# Altium PCB AT_32_PCB.PcbDoc
Units mm, origin at the board's own origin, x right, y up, seen from the top; angles counter-clockwise.
Board outline 107 x 107 mm, 2 copper layers (Top Layer, Bottom Layer); 69 components, 56 nets, 273 pads, 0 vias.
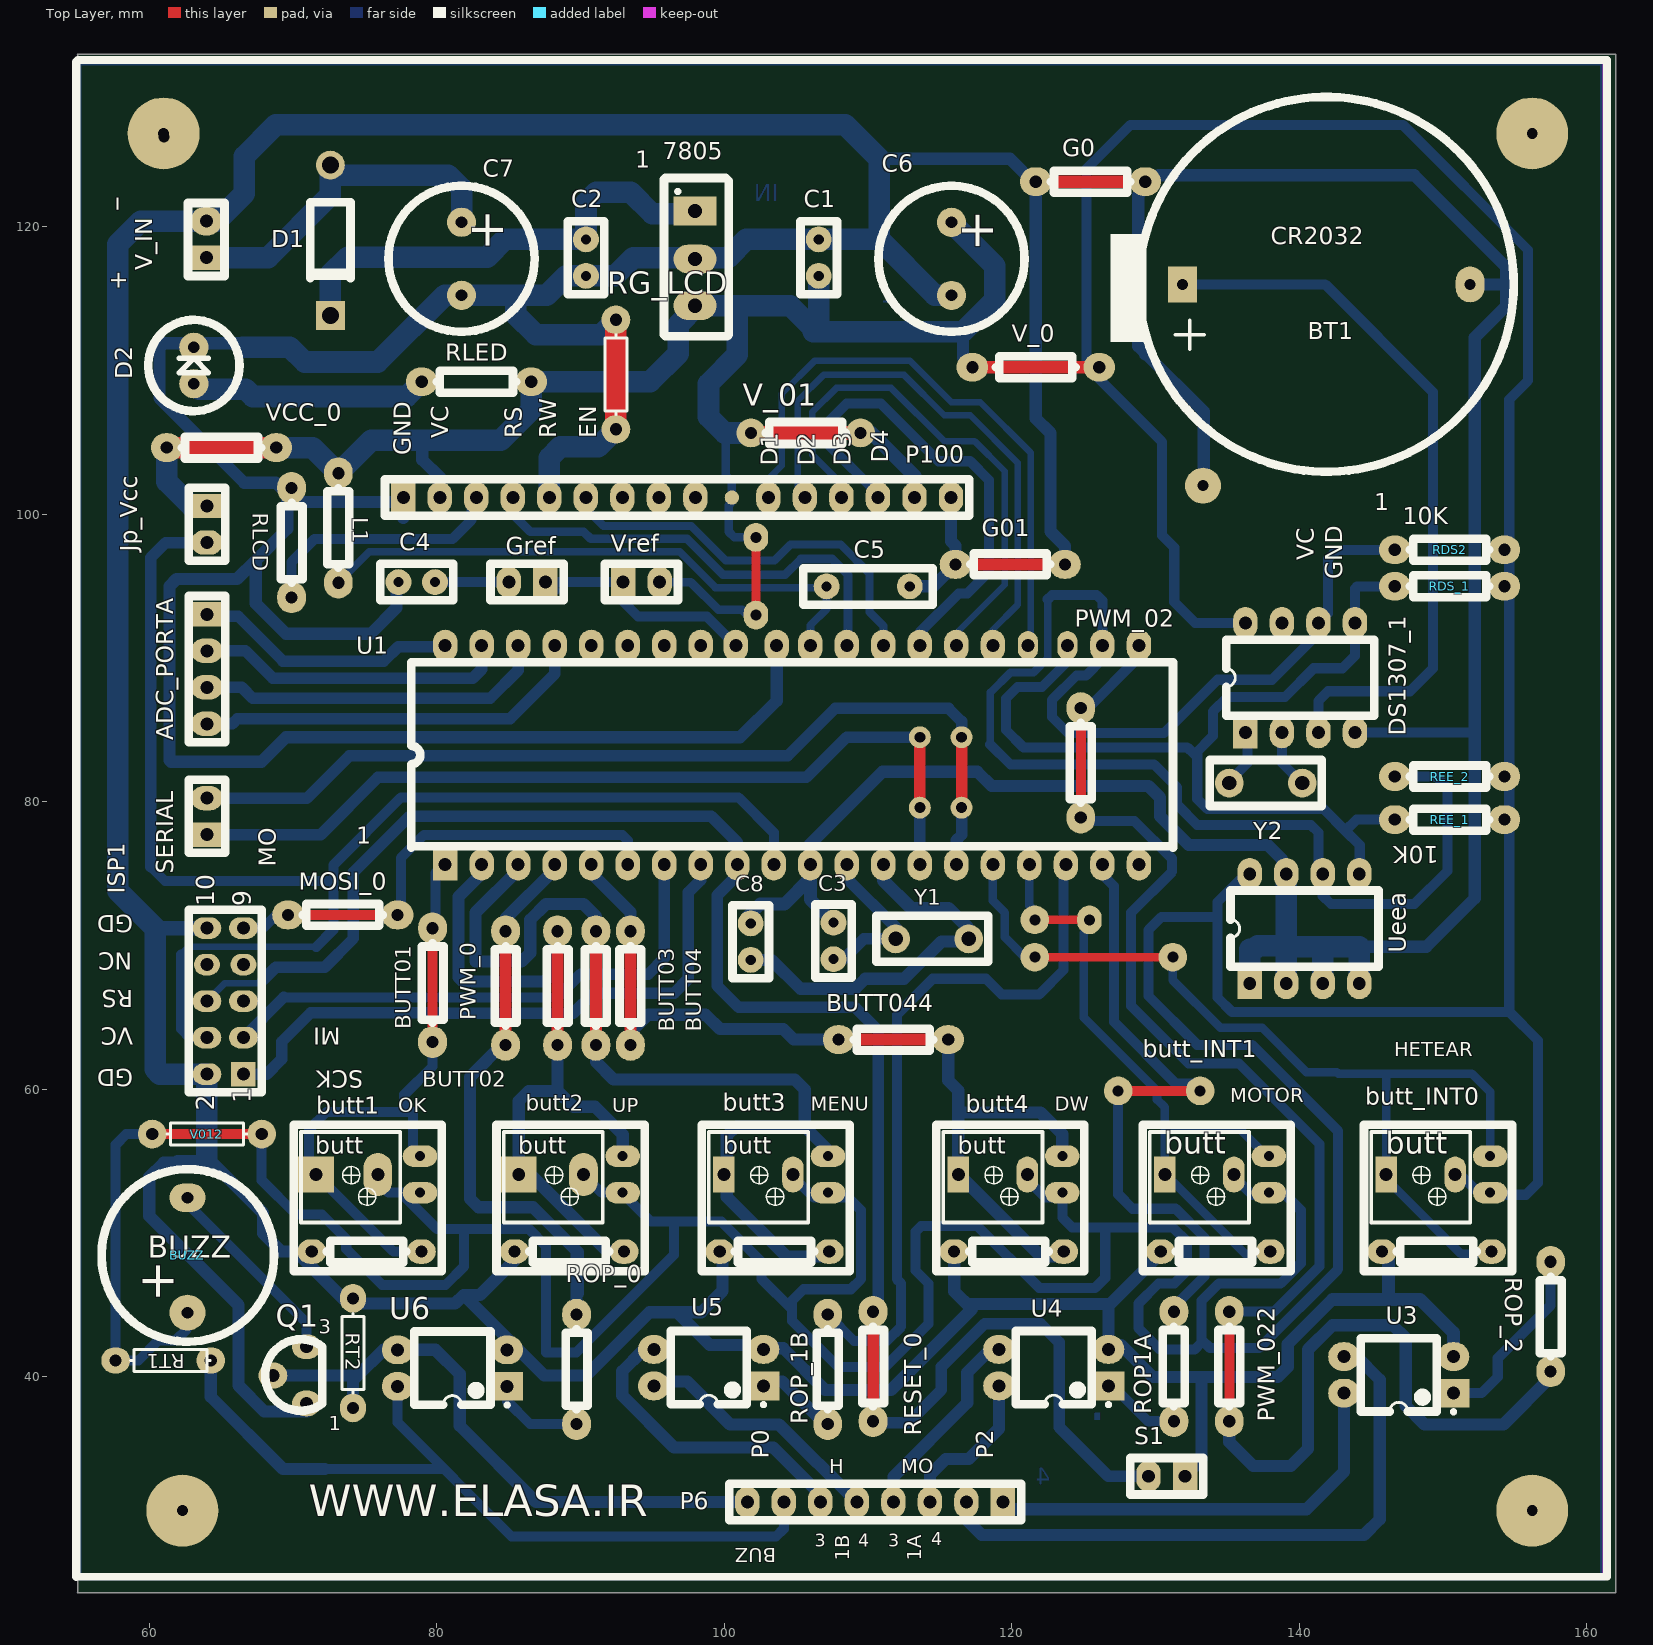
[diagram p0: Top Layer view]
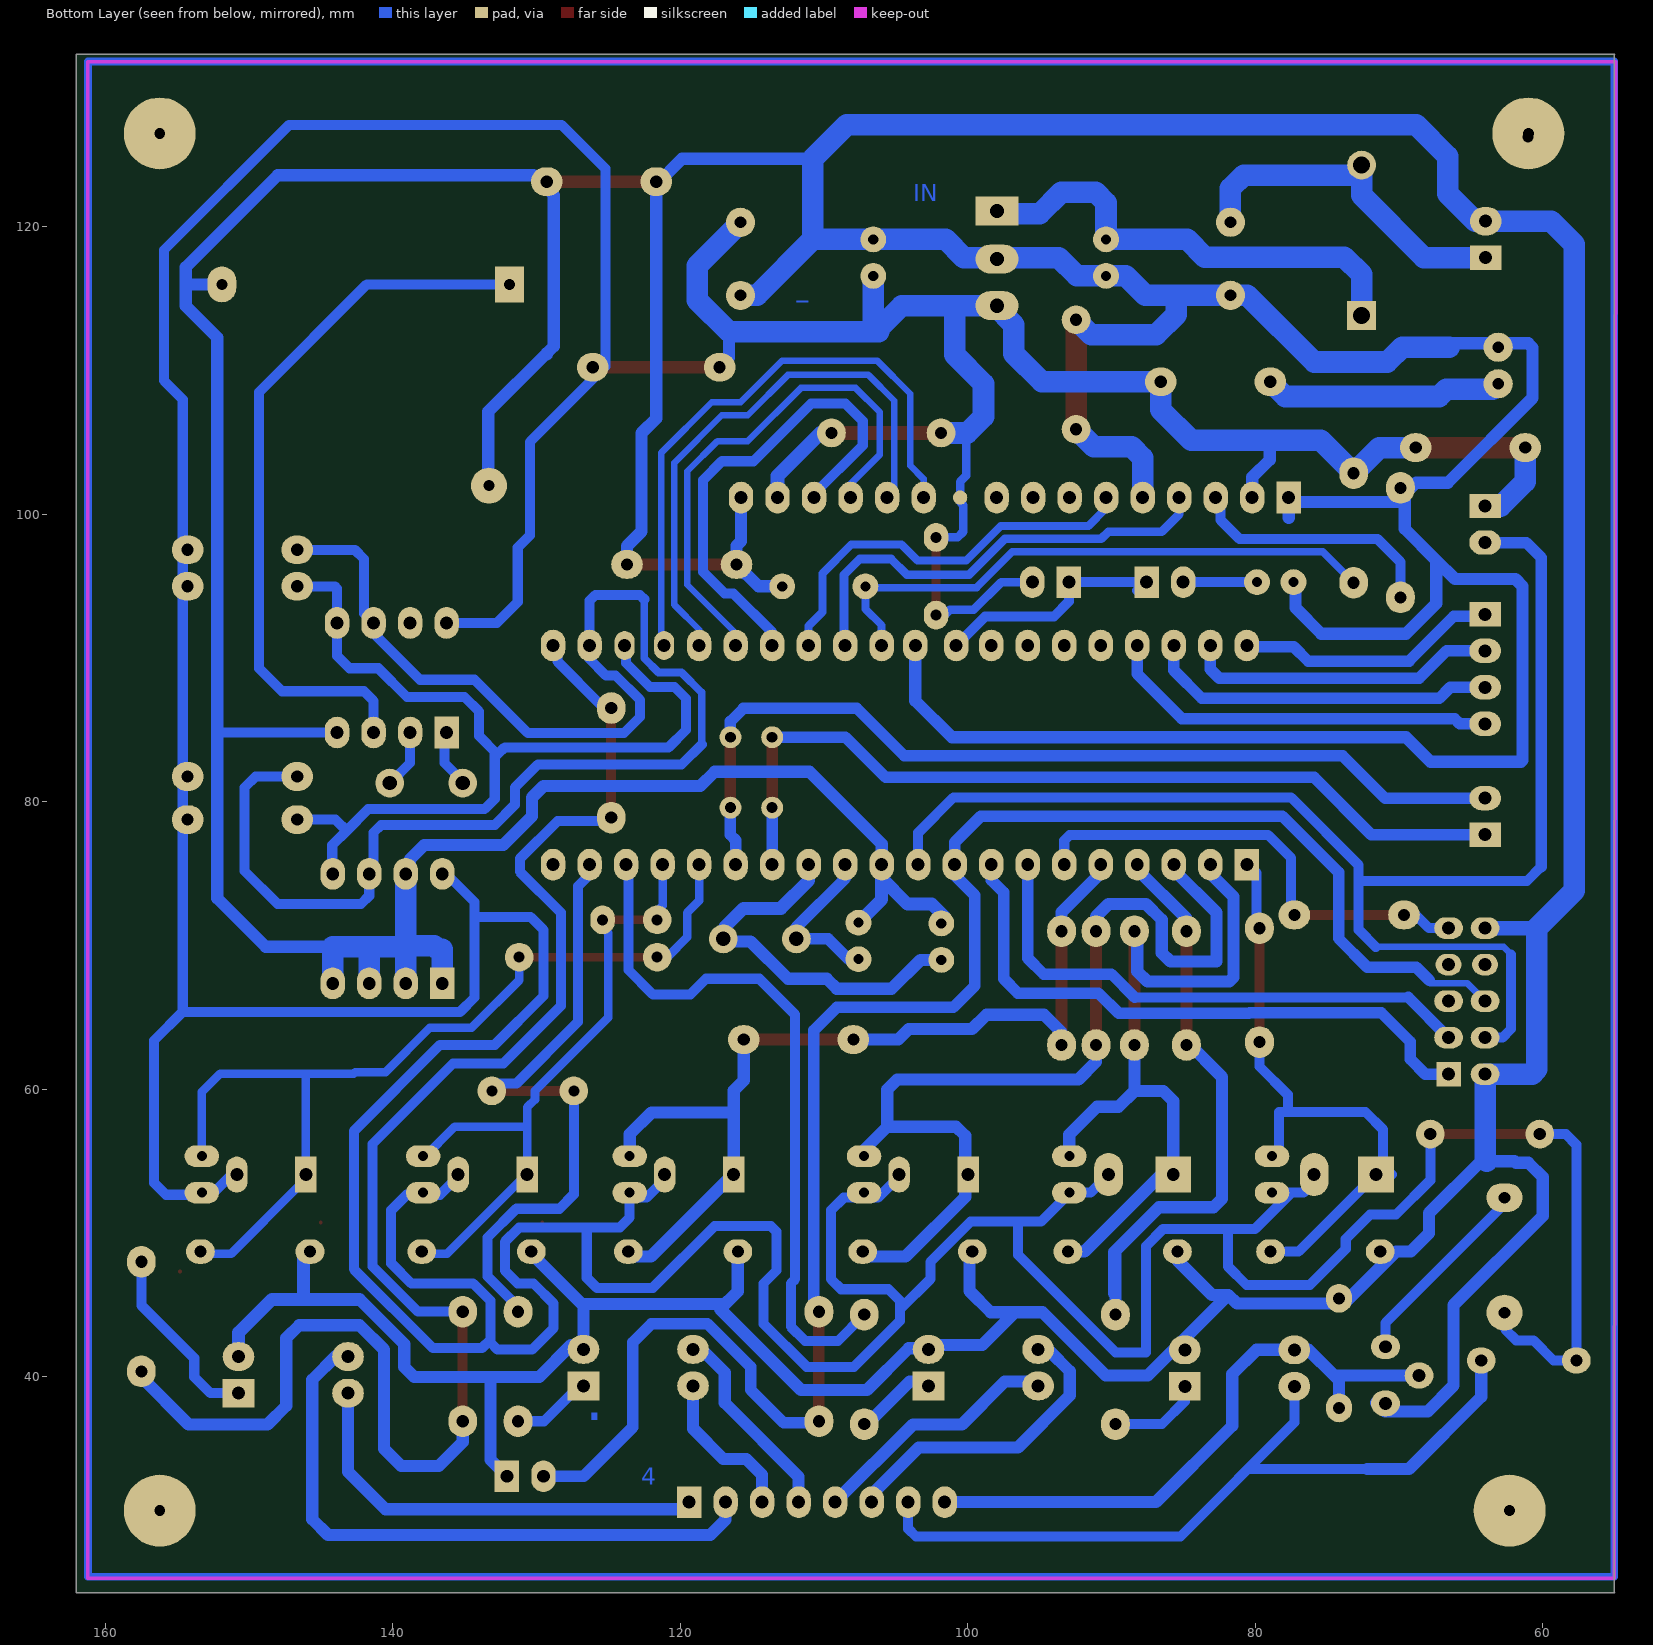
[diagram p1: Bottom Layer view, seen from below]

## Layer stack, top to bottom
Top Layer: signal copper 0.0356
Dielectric: dielectric 0.32, FR-4, Dk 4.8
Bottom Layer: signal copper 0.0356

## Board outline
162,132 162,97 162,25 132,25 55,25 55.014,25.014 55.014,45.593 55.014,131.986 55,132 75,132 162,132

## Design rules (kind name [scope] priority, off if disabled: settings)
Clearance [All] p1: gap=0.254
PolygonConnect [All] p1: connectstyle=Relief reliefconductorwidth=0.254 reliefentries=4 polygonreliefangle="90 Angle"
RoomDefinition AT32 [InComponentClass('AT32')] p1: confinementstyle=ConfineIn formatcopy=TRUE lockcomponents=FALSE outline 161.2,29 173.7,29 173.7,41.1 161.2,41.1
RoutingLayers [All] p1: top layer_v5=FALSE bottom layer_v5=TRUE
RoutingVias [All] p1: holewidth=0.711 width=1.27 viastyle="Through Hole" minholewidth=0.711 minwidth=1.27 maxholewidth=0.711 maxwidth=1.27
SilkscreenOverComponentPads [All] p1: minsilkscreentomaskgap=0.254
SolderMaskExpansion [All] p1: expansion=0.102
Width [All] p1: maxlimit=2 minlimit=0.3 preferedwidth=0.8
26 further rules are at their usual default settings.

## Components (designator, comment, footprint, x,y, rotation, side; value= is the part's Value field where it differs from the comment)
7805 "LM78M05CT" T03B 97.964,117.764 r270 top
ADC_PORTA "Header 4" HDR1X4 64.008,93.052 r270 top
BT1 "Battery" BATT 140.612,115.824 r270 top
butt1 "sch_butt" pcb_butt#1 58.152,57.04 r0 top
BUTT01 "Res1" AXIAL-0.3#1 79.704,67.4 r90 top
butt2 "sch_butt" pcb_butt#2 72.252,57.04 r0 top
BUTT02 "Res1" AXIAL-0.3#2 88.4,67.2 r90 top
butt3 "sch_butt" pcb_butt#3 86.528,57.04 r0 top
BUTT03 "Res1" AXIAL-0.3#2 91.072,67.2 r90 top
butt4 "sch_butt" pcb_butt#3 102.832,57.04 r0 top
BUTT04 "Res1" AXIAL-0.3#2 93.472,67.2 r90 top
BUTT044 "Res1" AXIAL-0.3#3 111.76,63.468 r180 top
butt_INT0 "sch_butt" pcb_butt#4 132.596,57.04 r0 top
butt_INT1 "sch_butt" pcb_butt#4 117.2,57.04 r0 top
BUZZ "BUZZ_SH" BUZZ 62.676,48.452 r0 top
C1 "Cap" RAD-0.1#1 106.568,117.864 r270 top
C2 "Cap" RAD-0.1#1 90.376,117.864 r90 top
C3 "Cap" RAD-0.1#1 107.6,70.328 r90 top
C4 "Cap" RAD-0.1#1 78.604,95.288 r180 top
C5 "Cap" RAD-0.1#2 107.188,94.996 r180 top
C6 "Cap Pol1" C_+ 115.824,117.856 r180 top
C7 "Cap Pol1" C_+ 81.74,117.864 r180 top
C8 "Cap" RAD-0.1#1 101.836,70.28 r90 top
D1 "Diode 1N4007" DIO10.46-5.3x2.8 72.596,119.072 r270 top
D2 "LED0" LED0 63.148,110.236 r0 top
DS1307_1 "DS1307" DIP8 140.059,88.64 r0 top
G0 "Res1" AXIAL-0.3#3 125.476,123.148 r180 top
G01 "Res1" AXIAL-0.3#3 119.888,96.52 r180 top
Gref "Header 2" HDR1X2#1 87.548,95.288 r180 top
ISP1 "Header 5X2" HDR2X5 66.548,61.064 r90 top
Jp_Vcc "Header 2" HDR1X2#1 64.008,100.584 r270 top
L1 "Inductor" AXIAL-0.3#3 73.152,99.06 r270 top
MOSI_0 "Res1" AXIAL-0.3#3 73.46,72.136 r180 top
P6 "Header 8" HDR1X8 119.38,31.292 r180 top
P100 "Header 16" HDR1X16 77.668,101.172 r0 top
PWM_0 "Res1" AXIAL-0.3#2 84.784,67.2 r90 top
PWM_02 "Res1" AXIAL-0.3#3 124.8,82.72 r90 top
PWM_022 "Res1" AXIAL-0.3#3 135.128,40.728 r90 top
Q1 "2N3904" BCY-W3/E4 70.536,40.132 r0 top
RDS2 "Res1" AXIAL-0.3#3 150.452,97.536 r0 top
RDS_1 "Res1" AXIAL-0.3#3 150.452,94.996 r180 top
REE_1 "Res1" AXIAL-0.3#3 150.452,78.768 r0 top
REE_2 "Res1" AXIAL-0.3#3 150.452,81.768 r0 top
RESET_0 "Res1" AXIAL-0.3#3 110.344,40.728 r90 top
RG_LCD "Res1" AXIAL-0.3#4 92.456,109.728 r90 top
RLCD "Res1" AXIAL-0.3#3 69.896,98.036 r90 top
RLED "Res1" AXIAL-0.3#3 82.756,109.228 r0 top
ROP1A "Res1" AXIAL-0.3#3 131.272,40.728 r270 top
ROP_0 "Res1" AXIAL-0.3#3 89.72,40.528 r270 top
ROP_1B "Res1" AXIAL-0.3#3 107.188,40.528 r270 top
ROP_2 "Res1" AXIAL-0.3#3 157.48,44.196 r270 top
RT1 "Res1" AXIAL-0.3#5 61.468,41.148 r0 top
RT2 "Res1" AXIAL-0.3#6 74.168,41.656 r90 top
S1 "SW-PB" HDR1X2#1 132.048,33.092 r180 top
SERIAL "Header 2" HDR1X2#1 64.008,77.724 r90 top
U1 "ATmega32L-8PI" 40P6 104.712,83.26 r0 top
U3 "Optoisolator1" DIP-4 146.914,40.144 r180 top
U4 "Optoisolator1" DIP-4 122.914,40.644 r180 top
U5 "Optoisolator1" DIP-4 98.914,40.644 r180 top
U6 "Optoisolator1" DIP-4 81.084,40.614 r180 top
Ueea "AT17C65-10PC" 8P3 140.359,71.184 r0 top
V012 "Res1" AXIAL-0.3#4 64.008,56.896 r180 top
V_0 "Res1" AXIAL-0.3#7 121.666,110.236 r0 top
V_01 "Res1" AXIAL-0.3#4 105.664,105.664 r180 top
V_IN "Header 2" HDR1X2#2 63.964,117.856 r90 top
VCC_0 "Res1" AXIAL-0.3#3 65.024,104.648 r180 top
Vref "Header 2" HDR1X2#1 92.964,95.288 r0 top
Y1 "XTAL" CAPR5.08-7.8x3.2 114.456,70.472 r0 top
Y2 "XTAL" CAPR5.08-7.8x3.2 137.668,81.312 r0 top

## Footprints (in the part's own frame and the unit in brackets; to place one, negate y for a bottom-side part, rotate by r counter-clockwise, add the part's x,y. Pads: shape width x height; smd on the part's side, far side on the other; paste and mask are expansions set on the pad)
8P3 [mm] "DIP; 8 Leads; Row Spacing 7.62 mm; Pitch 2.54 mm"
  rect 1.7x2.2 hole 0.9: 1(-3.81,-3.81)
  oval 1.7x2.2 hole 0.9: 2(-1.27,-3.81) 3(1.27,-3.81) 4(3.81,-3.81) 5(3.81,3.81) 6(1.27,3.81) 7(-1.27,3.81) 8(-3.81,3.81)
  silkscreen extent -5.15,-2.65 5.15,2.65
40P6 [mm] "DIP; 40 Leads; Row Spacing 15.24 mm; Pitch 2.54 mm"
  rect 1.7x2.2 hole 0.9: 1(-24.13,-7.62)
  oval 1.7x2.2 hole 0.9: 2(-21.59,-7.62) 3(-19.05,-7.62) 4(-16.51,-7.62) 5(-13.97,-7.62) 6(-11.43,-7.62) 7(-8.89,-7.62) 8(-6.35,-7.62) 9(-3.81,-7.62) 10(-1.27,-7.62) 11(1.27,-7.62) 12(3.81,-7.62) 13(6.35,-7.62) 14(8.89,-7.62) 15(11.43,-7.62) 16(13.97,-7.62) 17(16.51,-7.62) 18(19.05,-7.62) 19(21.59,-7.62) 20(24.13,-7.62) 21(24.13,7.62) 22(21.59,7.62) 25(13.97,7.62) 26(11.43,7.62) 27(8.89,7.62) 28(6.35,7.62) 29(3.81,7.62) 30(1.27,7.62) 31(-1.07,7.62) 32(-3.91,7.62) 33(-6.35,7.62) 34(-8.89,7.62) 35(-11.43,7.62) 36(-13.97,7.62) 37(-16.51,7.62) 38(-19.05,7.62) 39(-21.59,7.62) 40(-24.13,7.62)
  oval 1.4x2 hole 0.9: 23(19.15,7.62) 24(16.41,7.62)
  silkscreen extent -26.5,-6.45 26.5,6.45
AXIAL-0.3#1 [mm] "Axial Device, Thru-Hole; 2 Leads; 0.3 in Pin Spacing"
  oval 2.2x2 hole 0.85: 1(-4.11,0.004) 2(3.81,0)
  silkscreen extent -2.77,-0.76 2.77,0.76
AXIAL-0.3#2 [mm] "Axial Device, Thru-Hole; 2 Leads; 0.3 in Pin Spacing"
  oval 2.2x2 hole 0.85: 1(-4.11,0) 2(3.81,0)
  silkscreen extent -2.77,-0.76 2.77,0.76
AXIAL-0.3#3 [mm] "Axial Device, Thru-Hole; 2 Leads; 0.3 in Pin Spacing"
  oval 2.2x2 hole 0.85: 1(-3.81,0) 2(3.81,0)
  silkscreen extent -2.77,-0.76 2.77,0.76
AXIAL-0.3#4 [mm] "Axial Device, Thru-Hole; 2 Leads; 0.3 in Pin Spacing"
  round 2 hole 0.85: 1(-3.81,0) 2(3.81,0)
  silkscreen extent -2.77,-0.76 2.77,0.76
AXIAL-0.3#5 [mm] "Axial Device, Thru-Hole; 2 Leads; 0.3 in Pin Spacing"
  oval 2x1.8 hole 0.85: 1(-3.81,0) 2(2.81,0)
  silkscreen extent -2.77,-0.76 2.77,0.76
AXIAL-0.3#6 [mm] "Axial Device, Thru-Hole; 2 Leads; 0.3 in Pin Spacing"
  oval 2x1.8 hole 0.85: 1(-3.81,0) 2(3.81,0)
  silkscreen extent -2.77,-0.76 2.77,0.76
AXIAL-0.3#7 [mm] "Axial Device, Thru-Hole; 2 Leads; 0.3 in Pin Spacing"
  oval 2.2x2 hole 0.85: 1(-4.41,0) 2(4.41,0)
  silkscreen extent -2.77,-0.76 2.77,0.76
BATT [mm]
  rect 2.5x2 hole 0.762: 0(-0.178,-8.735)
  oval 2.5x2 hole 0.762: 1(-0.178,11.265)
  silkscreen extent -13.21,-13.74 12.86,14.3
BCY-W3/E4 [mm] "TO, Flat Index; 3 In-Line, Axial Leads; Body Dia. 4.5mm; Leads 0.51 x 0.48 mm (max)"
  oval 2x1.8 hole 0.9: 1(0.4,-1.97) 2(-1.936,-0.032)
  oval 2x1.7 hole 0.9: 3(0.4,1.97)
  silkscreen extent -2.48,-2.48 1.5,2.48
BUZZ [mm]
  round 2.5 hole 0.813: 1(-0.02,-3.98)
  oval 2.5x2 hole 0.813: 2(-0.02,4.02)
  silkscreen extent -6,-6 6,6
C_+ [mil]
  round 80 hole 32: 1(0.79,-96.85) 2(0.79,103.15)
  silkscreen extent -199,-197 201,203
CAPR5.08-7.8x3.2 [mm] "Capacitor, Ceramic, Thru-Hole, Dipped Radial; Body 7.8 x 3.2 mm (WxT) Pin Spacing 5.08 mm (typ)"
  round 2 hole 1: 1(-2.54,0) 2(2.54,0)
  silkscreen extent -3.9,-1.6 3.9,1.6
DIO10.46-5.3x2.8 [mm] "Diode, Axial; Body 5.2 x 2.7 mm (LxDia. max), Lead Dia. 0.86 mm (max)"
  round 2 hole 1.2: 1(-5.23,0)
  rect 2x2 hole 1.2: 2(5.23,0)
  silkscreen extent -2.65,-1.4 2.75,1.4
DIP8 [mm] "DIP; 8 Leads; Row Spacing 7.62 mm; Pitch 2.54 mm"
  rect 1.7x2.2 hole 0.9: 1(-3.81,-3.81)
  oval 1.7x2.2 hole 0.9: 2(-1.27,-3.81) 3(1.27,-3.81) 4(3.81,-3.81) 5(3.81,3.81) 6(1.27,3.81) 7(-1.27,3.81) 8(-3.81,3.81)
  silkscreen extent -5.15,-2.65 5.15,2.65
DIP-4 [mm] "DIP; 4 Leads; Row Spacing 7.62 mm; Pitch 2.54 mm"
  rect 2.2x2 hole 0.9: 1(-3.81,1.27)
  oval 2.2x2 hole 0.9: 2(-3.81,-1.27) 3(3.81,-1.27) 4(3.81,1.27)
  silkscreen extent -3.94,-2.55 2.65,2.69, body extent -3.15,-2.5 3.15,2.5, height 5.6
HDR1X2#1 [mm] "Connector; Header; 2 Position"
  rect 1.7x2.2 hole 0.9: 1(0,0)
  oval 1.7x2.2 hole 0.9: 2(2.54,0)
  silkscreen extent -1.27,-1.27 3.81,1.27
HDR1X2#2 [mm] "Connector; Header; 2 Position"
  rect 1.7x2.2 hole 0.9: 1(0,0)
  oval 2x2.2 hole 0.9: 2(2.54,0)
  silkscreen extent -1.27,-1.27 3.81,1.27
HDR1X4 [mm] "Connector; Header; 4 Position"
  rect 1.7x2.2 hole 0.9: 1(0,0)
  oval 1.7x2.2 hole 0.9: 2(2.54,0) 3(5.08,0) 4(7.62,0)
  silkscreen extent -1.27,-1.27 8.89,1.27
HDR1X8 [mm] "Connector; Header; 8 Position"
  rect 1.7x2.2 hole 0.9: 1(0,0)
  oval 1.7x2.2 hole 0.9: 2(2.54,0) 3(5.08,0) 4(7.62,0) 5(10.16,0) 6(12.7,0) 7(15.24,0) 8(17.78,0)
  silkscreen extent -1.27,-1.27 19.05,1.27
HDR1X16 [mm] "Connector; Header; 16 Position"
  rect 1.7x2.2 hole 0.9: 1(0,0)
  oval 1.7x2.2 hole 0.9: 2(2.54,0) 3(5.08,0) 4(7.62,0) 5(10.16,0) 6(12.7,0) 7(15.24,0) 8(17.78,0) 9(20.32,0) 11(25.4,0) 12(27.94,0) 13(30.48,0) 14(33.02,0) 15(35.56,0) 16(38.1,0)
  round 1 all layers, no hole: 10(22.86,0)
  silkscreen extent -1.27,-1.27 39.37,1.27
HDR2X5 [mm] "Connector; Header; 5x2 Position"
  rect 1.7x1.7 hole 0.9: 1(0,0)
  oval 1.5x2 hole 0.9: 2(0,2.54) 3(2.54,0) 4(2.54,2.54) 5(5.08,0) 6(5.08,2.54) 9(10.16,0) 10(10.16,2.54)
  oval 1.5x1.8 hole 0.9: 7(7.62,0) 8(7.62,2.54)
  silkscreen extent -1.27,-1.27 11.43,3.81
LED0 [mil]
  round 80 hole 32: 1(-2.05,-45.2) 2(-2.05,54.8)
  silkscreen extent -127,-120 123,130
pcb_butt#1 [mm]
  rect 2.5x2.5 hole 0.9: 1(13.446,-2.964)
  oval 2x3 hole 0.9: 2(17.746,-2.964)
  oval 2.4x1.5 hole 0.7: c1(20.678,-4.222) c2(20.678,-1.682)
  oval 2x1.7 hole 0.85: r1(20.774,-8.318) r2(13.154,-8.318)
  silkscreen extent 11.9,-9.7 22.2,0.5
pcb_butt#2 [mm]
  rect 2.5x2.5 hole 0.9: 1(13.446,-2.964)
  oval 2x3 hole 0.9: 2(17.946,-2.964)
  oval 2.4x1.5 hole 0.7: c1(20.678,-4.222) c2(20.678,-1.682)
  oval 2x1.7 hole 0.85: r1(20.774,-8.318) r2(13.154,-8.318)
  silkscreen extent 11.9,-9.7 22.2,0.5
pcb_butt#3 [mm]
  rect 1.5x2.5 hole 0.9: 1(13.446,-2.964)
  oval 1.5x2.5 hole 0.9: 2(18.246,-2.964)
  oval 2.4x1.5 hole 0.7: c1(20.678,-4.222) c2(20.678,-1.682)
  oval 2x1.7 hole 0.85: r1(20.774,-8.318) r2(13.154,-8.318)
  silkscreen extent 11.9,-9.7 22.2,0.5
pcb_butt#4 [mm]
  rect 1.5x2.5 hole 0.9: 1(13.446,-2.964)
  oval 1.5x2.5 hole 0.9: 2(18.246,-2.964)
  oval 2.4x1.5 hole 0.7: c1(20.678,-4.222) c2(20.678,-1.682)
  oval 2x1.7 hole 0.85: r1(20.774,-8.318) r2(13.154,-8.318)
  Top Layer lines w0.254: 12.4,-6.3 12.4,-6.3 ; 22.2,-9.7 22.2,-9.7
  silkscreen extent 11.9,-9.7 22.2,0.5
RAD-0.1#1 [mm] "Radial Cap, Thru-Hole; 2 Leads; 0.1 in Pin Spacing"
  round 1.8 hole 0.7: 1(-1.27,0) 2(1.27,0)
  silkscreen extent -2.54,-1.27 2.54,1.27
RAD-0.1#2 [mm] "Radial Cap, Thru-Hole; 2 Leads; 0.1 in Pin Spacing"
  round 1.8 hole 0.7: 1(-5.712,-0.004) 2(0.07,0)
  silkscreen extent -7.31,-1.27 1.69,1.27
T03B [mm] "TO, Thru-Hole, Vertical, Heatsink Mounted; 3 In-Line Leads; Pitch 2.54 mm"
  rect 2x3 hole 1: 1(-3.34,0)
  oval 2x3 hole 1: 2(0,0) 3(3.24,0)
  silkscreen extent -4.82,-1.32 -4.58,-1.07

## Part data
7805: "3-Terminal Positive Voltage Regulators"
ADC_PORTA: "Header, 4-Pin"
BT1: library part "Battery holder", "Battery holder CR2032"
BUTT01 BUTT02 BUTT03 BUTT04 BUTT044 G0 G01 MOSI_0 PWM_0 PWM_02 PWM_022 RDS2 RDS_1 REE_1 REE_2 RESET_0 RG_LCD RLCD RLED ROP1A ROP_0 ROP_1B ROP_2 RT1 RT2 V012 V_0 V_01 VCC_0: "Resistor"
C1 C2 C3 C4 C5 C8: "Capacitor"
C6 C7: "Polarized Capacitor (Radial)"
D1: "1 Amp General Purpose Rectifier"
D2: "Typical INFRARED GaAs LED"
DS1307_1: "64 X 8 Serial Real-Time Clock"
Gref Jp_Vcc SERIAL V_IN Vref: "Header, 2-Pin"
ISP1: "Header, 5-Pin, Dual row"
P6: "Header, 8-Pin"
P100: "Header, 16-Pin"
Q1: "NPN General Purpose Amplifier"
S1: "Switch"
U1: "8-Bit AVR Microcontroller with 32K Bytes of In-System Programmable Flash Memory"
U3 U4 U5 U6: "4-Pin Phototransistor Optocoupler"
Ueea: "FPGA Configuration EEPROM 64K Memory"
Y1 Y2: "Crystal Oscillator"

## Free pads (board coordinates)
  round 1.524 hole 0.762: 0(113.6,79.6) 0(156.2,30.7) 1(62.3,30.7) 1(116.5,79.6) 2(61.03,126.26) 2(113.6,84.5) 3(116.5,84.5) 3(156.2,126.5)
  round 2.5 hole 0.762: 0(133.3,102)
  oval 1.7x2 hole 0.762: 1(102.2,93) 1(102.2,98.4) 2(125.4,71.8)
  round 2 hole 0.762: 2(121.6,69.2) 2(121.6,71.8) 2(131.2,69.2) 3(127.4,59.9) 3(133.1,59.9)
  round 5 hole 0.762: 4(61,126.5) 4(62.3,30.7) 4(156.2,30.7) 4(156.2,126.5)

## Nets (pads, with @x,y where several pads share a name; then routed paths per layer and width w, separated by ;. In a path a pad name is that pad's centre, name@x,y a point inside that pad or via, vN(x,y) a via of type N, cw(c..) or ccw(c..) an arc to the next point about the centre after c; other vN are vias at no path point)
3: P6.8 Q1.2 RT2.1 U6.3 | length 42.6
  Bottom Layer w0.85: Q1.2 74.5,40.1 ; RT2.1 74.168,39.768 74.5,40.1 ; P6.8 86.908,31.292 81.6,36.6 81.6,40.2 79.916,41.884 U6.3 76.284,41.884 74.5,40.1
4: P6.7 RT1.2 U6.4 | length 56
  Bottom Layer w0.7: 72.2,33.6 80.5,33.6 ; U6.4 77.274,36.826 85.2,28.9 103.6,28.9 104.14,29.44 P6.7
  Bottom Layer w0.85: RT1.2 64.278,38.622 69.3,33.6 72.2,33.6 ; P6.7 P6.7@104.14,31.76
A0: ADC_PORTA.1 U1.40 | length 17.6
  Bottom Layer w0.8: ADC_PORTA.1@64.2,92.9 66.2,92.9 69.3,89.8 76.325,89.8 77.325,90.8 U1.40@80.1,90.8
A1: ADC_PORTA.2 U1.39 | length 21.7
  Bottom Layer w0.8: ADC_PORTA.2@64.2,90.512 66.688,90.512 68.6,88.6 82.5,88.6 83.122,89.222 U1.39@83.122,90.98
A2: ADC_PORTA.3 U1.38 | length 24.6
  Bottom Layer w0.8: ADC_PORTA.3 66.428,87.972 67.2,87.2 83.7,87.2 85.662,89.162 U1.38@85.662,90.98
A3: ADC_PORTA.4 U1.37 | length 27.7
  Bottom Layer w0.8: ADC_PORTA.4 65.764,85.432 66.132,85.8 85.1,85.8 88.202,88.902 U1.37@88.202,90.98
BUTT1: butt1.1 BUTT01.1 BUTT01.2 butt1.c2 butt1.r1 U1.1 | length 42.3
  Top Layer w0.7: BUTT01.1@79.704,63.59 BUTT01.2
  Bottom Layer w0.7: butt1.1@70.498,54.076 71.1,53.474 72.226,53.474 76.978,48.722 77.826,48.722 ; butt1.1@71.098,54.076 71.098,57.2 72.328,58.43 78.33,58.43 butt1.c2@78.33,55.358 ; 77.73,58.6 77.73,59.63 79.7,61.6 BUTT01.1 ; BUTT01.1@79.49,63.59 BUTT01.1@80.204,63.59 ; BUTT01.2@80.204,71.21 79.9,71.514 79.9,75.058 U1.1@80.582,75.74
BUTT2: BUTT02.1 butt2.1 BUTT02.2 butt2.c2 butt2.r1 U1.2 | length 55.4
  Top Layer w0.85: BUTT02.1@88.4,63.39 BUTT02.2
  Bottom Layer w0.85: U1.2@83.122,75.74 83.122,75.022 81.5,73.4 81.5,67.8 81.8,67.5 87.49,67.5 88.2,68.21 BUTT02.2@88.2,71.01 ; butt2.1@85.224,54.076 85.7,53.6 butt2.1@85.7,53.5 ; BUTT02.1@88.2,63.09 BUTT02.1@88.2,63.39 ; BUTT02.1 88.4,59.9 ; butt2.c2 92.93,56.87 91,58.8 89.5,58.8 88.4,59.9 ; butt2.r1 91.878,48.722 86.524,54.076 butt2.1 85.698,59.198 86.4,59.9 88.4,59.9
BUTT3: BUTT03.1 butt3.1 BUTT03.2 butt3.c2 butt3.r1 U1.3 | length 69.9
  Top Layer w0.85: BUTT03.1@91.072,63.39 BUTT03.2
  Bottom Layer w0.85: U1.3@85.662,75.74 85.662,75.262 82.7,72.3 82.7,68.9 85.9,68.9 86.5,69.5 86.5,71.8 87.6,72.9 90.2,72.9 91.072,72.028 BUTT03.2 ; BUTT03.1@91.072,63.39 91.072,61.928 92.3,60.7 104.9,60.7 105.596,60.004 105.596,57.404 ; butt3.c2@107.406,55.014 107.406,55.594 105.596,57.404 ; butt3.r1@107.502,48.378 104.322,48.378 100.174,52.526 100.174,56.774 100.804,57.404 105.596,57.404
BUTT4: butt4.1 BUTT04.1 BUTT04.2 butt4.c2 butt4.r1 BUTT044.1 BUTT044.2 U1.5 | length 67
  Top Layer w0.85: BUTT04.1@93.472,63.39 BUTT04.2 ; BUTT044.2 BUTT044.1
  Bottom Layer w0.85: U1.5@90.742,75.74 90.742,75.058 93.472,72.328 BUTT04.2 ; BUTT04.1@93.472,63.39 93.472,63.972 94.7,65.2 98.7,65.2 99.7,64.2 104.1,64.2 104.832,63.468 BUTT044.2 ; BUTT044.1 115.57,60.63 116.278,59.922 116.278,58.4 ; BUTT044.1@115.57,63.5 BUTT044.1@115.77,63.7 ; butt4.c2@123.51,55.014 123.51,56.89 122,58.4 116.278,58.4 ; butt4.r1@123.606,48.378 122.022,48.378 116.668,53.732 116.278,53.732 116.278,58.4
D1: P100.11 U1.24 | length 42.2
  Bottom Layer w0.45: P100.11@103.068,100.872 103.068,102.468 104,103.4 104,108.4 106.3,110.7 112.9,110.7 115.8,107.8 117.8,107.8 121.3,104.3 121.3,91.158 U1.24@121.122,90.98
D2: P100.12 U1.25 | length 39.1
  Bottom Layer w0.45: P100.12@105.608,100.872 105.1,101.379 105.1,107.9 106.9,109.7 112.5,109.7 115.3,106.9 117.1,106.9 120.4,103.6 120.4,93.7 118.682,91.982 U1.25@118.682,90.98
D3: P100.13 U1.26 | length 37
  Bottom Layer w0.45: P100.13@108.148,100.872 108.148,102.116 106.1,104.163 106.1,107.1 107.8,108.8 111.6,108.8 115.3,105.1 117.4,105.1 119.5,103 119.5,95.1 116.142,91.742 U1.26@116.142,90.98
D4: P100.14 U1.27 | length 34.9
  Bottom Layer w0.7: P100.14@110.5,100.684 110.688,100.872 110.688,101.412 107.3,104.8 107.3,106.5 108.5,107.7 110.9,107.7 114.9,103.7 117.1,103.7 118.4,102.4 118.4,96 116.9,94.5 116.3,94.5 113.602,91.802 U1.27
EN: P100.6 U1.28 | length 28.3
  Bottom Layer w0.56: P100.6@90.368,100.432 91.6,99.2 97.7,99.2 100.1,96.8 103.5,96.8 104.6,97.9 108.1,97.9 110.1,95.9 110.1,93.2 111.062,92.238 U1.28@111.062,90.98
  Bottom Layer w0.7: P100.6@90.368,100.432 P100.6@90.368,100.872
GND: 7805.2 BT1.1 butt1.r2 butt2.r2 butt3.r2 butt4.r2 butt_INT0.r2 butt_INT1.r2 C1.1 C2.1 C3.2 C4.2 C5.1 C6.2 C7.2 C8.2 D2.2 DS1307_1.4 G0.1 G0.2 G01.1 G01.2 ISP1.2 ISP1.10 P100.1 P100.5 P100.16 pad.0@133.3,102 Q1.1 RG_LCD.1 RG_LCD.2 RLCD.2 RT2.2 S1.1 U1.11 U1.31 U3.2 U4.2 U5.2 U6.2 Ueea.1 Ueea.2 Ueea.3 Ueea.4 Ueea.7 V_IN.2 | length 763.9
  Top Layer w0.85: G01.2 G01.1 ; G0.2 G0.1
  Top Layer w1.5: RG_LCD.1 RG_LCD.2
  Bottom Layer w0.7: DS1307_1.4 148.33,84.83 152.17,84.83 152.2,84.8
  Bottom Layer w0.85: 64,57.2 64,61.056 ISP1.2 64.008,59.592 ; 66.8,111.9 61,111.9 60.7,111.6 60.7,108.1 66.6,102.2 68.8,102.2 70.128,100.872 77.668,100.872 77.668,99.766 ; RLCD.2@69.596,101.346 69.596,98.996 67.4,96.8 ; Q1.1@71.574,38.205 70.969,37.6 68,37.6 66.2,39.4 66.2,45 60,51.2 60,53.9 61,54.9 61.856,54.9 61.957,55.001 63.9,55.001 64.299,55.001 67.9,51.4 67.9,50 69.178,48.722 70.206,48.722 73.828,45.1 81.268,45.1 81.868,45.7 ; C4.2@77.2,95.4 77.2,93.5 75.4,91.7 69.5,91.7 67.4,93.8 67.4,96.8 ; butt2.r2 85.406,48.106 83,45.7 81.868,45.7 ; butt3.r2@99.882,48.378 99.882,45.982 98.393,44.493 96.707,44.493 ; U1.31 103.642,87.042 101.1,84.5 69.5,84.5 67.8,82.8 61.5,82.8 61.4,82.9 61.4,95 61.9,95.5 66.1,95.5 67.4,96.8 ; U1.11@105.982,75.74 105.982,77.082 111,82.1 117.6,82.1 118.6,81.1 129.5,81.1 130.3,80.3 130.3,79 132.3,77 137.8,77 138.789,76.011 Ueea.7@138.789,74.994 ; 110.766,124.734 119.866,124.734 121.666,122.934 121.666,118.3 ; C5.1 114.558,95 G01.2 116.078,97.822 115.768,98.132 P100.16@115.768,100.872 ; butt4.r2@115.986,48.378 116,48.364 116,45.953 117.226,44.726 111.6,39.1 107,39.1 104.1,42 103,42 102.724,42.276 102.724,42.214 98.986,42.214 96.707,44.493 ; 116.876,45.076 126.724,45.076 126.724,44.948 ; 121.666,117.348 121.666,118.3 ; G01.1 123.698,97.802 122.682,98.818 122.682,105.664 121.666,106.68 121.666,118.3 ; 129.286,111.114 129.286,111.214 ; butt_INT1.r2@130.354,48.578 126.724,44.948 ; S1.1 133.2,34.244 133.2,40 ; pad.0@133.1,102 133.35,102.25 133.35,107.15 129.286,111.214 ; 142.3,45.4 139.2,42.3 139.2,40.7 138.5,40 133.2,40 ; 143.869,69.931 144.169,69.931 148.831,69.931 152.2,73.3 152.2,84.8 152.2,112.3 154.4,114.5 154.4,116 ; BT1.1 154.398,116.002 154.4,116 ; 81.868,45.7 87.468,40.1 90.4,40.1 94.793,44.493 96.707,44.493 ; 126.724,44.948 126.724,42.214 127.586,42.214 129.8,40 133.2,40 ; 129.286,111.214 128.8,111.7 128.8,122.2 130.2,123.6 148,123.6 154.4,117.2 154.4,116
  Bottom Layer w0.9: C8.2@101.6,72 102.5,72.9 104.2,72.9 105.982,74.682 U1.11 ; U1.11@105.982,75.74 U1.11 ; C3.2 105.982,73.216 U1.11 ; 142.3,45.4 146.2,45.4 ; butt_INT0.r2@146.25,48.578 146.2,48.528 146.2,45.4 ; U3.2@150.724,42.214 150.724,43.076 148.4,45.4 146.2,45.4
  Bottom Layer w1: 60.4,71.224 ISP1.10
  Bottom Layer w1.5: 63.9,55.001 64.008,55.109 ISP1.2 60.736,61.064 60.4,61.4 60.4,71.224 57.8,73.824 57.8,118.8 59.396,120.396 61.864,120.396 64.696,120.396 66.6,122.3 66.6,124.9 68.8,127.1 108.4,127.1 110.766,124.734 110.766,119.134 ; 66.496,111.628 69.772,111.628 70.8,110.6 75.9,110.6 80.544,115.244 C7.2 85.5,115.244 ; P100.5 87.828,103.928 88.6,104.7 91.238,104.7 RG_LCD.1 ; RG_LCD.2 91.418,112.5 86.9,112.5 85.5,113.9 85.5,115.244 ; C6.2@115.692,115.244 114.656,115.244 110.766,119.134 ; Ueea.1 136.549,69.749 ; 136.849,69.749 137.1,70 138.789,70 138.858,69.931 139.089,69.931 ; Ueea.2 139.089,69.931 ; Ueea.7 139.089,69.931 ; Ueea.3 141.629,69.931 ; 143.869,69.931 141.629,69.931 ; Ueea.4 144.169,69.931 ; 85.5,115.244 87.644,115.244 88.994,116.594 C2.1 92.394,116.594 93.664,117.864 100.264,117.864 101.534,119.134 C1.1 110.766,119.134 ; 139.089,69.931 141.629,69.931
INT1: butt_INT1.1 butt_INT1.c2 butt_INT1.r1 pad.2@121.6,71.8 pad.2@125.4,71.8 U1.17 | length 45.1
  Top Layer w0.6: pad.2@122.2,71.8 pad.2@125.4,71.8
  Bottom Layer w0.6: U1.17@121.222,75.74 U1.17 121.222,72.778 pad.2@122.2,71.8 ; pad.2@125.4,71.3 125,70.9 125,65 130.1,59.9 130.1,59.3 130.646,58.754 130.646,57.4 ; butt_INT1.c2@137.878,55.214 135.692,57.4 130.646,57.4 ; butt_INT1.r1@137.974,48.578 136.222,48.578 130.868,53.932 130.646,53.932 130.646,57.4
INTO: butt_INT0.1 butt_INT0.c2 butt_INT0.r1 pad.2@121.6,69.2 pad.2@131.2,69.2 U1.16 | length 66.6
  Top Layer w0.6: pad.2@122.2,69.2 pad.2@131.2,69.2
  Bottom Layer w0.6: U1.16@118.682,75.74 U1.16 118.682,73.118 119.5,72.3 119.5,70.6 120.9,69.2 pad.2@122.2,69.2 ; pad.2@131.2,69.2 131.2,67.6 134.5,64.3 137.4,64.3 140.5,61.2 142.6,61.2 142.7,61.1 152,61.1 153.274,59.826 butt_INT0.c2 ; 146.042,61.1 butt_INT0.1 146.042,53.632 146.542,53.258 151.222,48.578 butt_INT0.r1@153.87,48.578 ; butt_INT0.c2@153.374,55.214 butt_INT0.c2@153.374,55.358
MICO: ISP1.3 U1.7 | length 38.2
  Bottom Layer w0.7: 69.342,66.398 88.376,66.398
  Bottom Layer w0.8: ISP1.3 69.342,66.398 ; 88.376,66.398 90,68.022 94.722,68.022 95.822,69.122 U1.7@95.822,75.74
MOSI: ISP1.9 MOSI_0.1 MOSI_0.2 U1.6 | length 33.7
  Top Layer w0.7: MOSI_0.2@69.85,72.136 MOSI_0.1@77.47,72.136
  Bottom Layer w0.7: ISP1.9 67.924,71.224 68.836,72.136 MOSI_0.2@69.85,72.136 ; MOSI_0.1@77.5,71.9 77.5,76.1 79.1,77.7 92.9,77.7 93.282,77.318 U1.6@93.282,75.74
Net7805_1: 7805.1 C2.2 D1.2 | length 32.2
  Bottom Layer w1.5: D1.2 72.596,116.696 73.8,117.9 83.5,117.9 84.734,119.134 C2.2 90.376,121.676 91.1,122.4 93.5,122.4 95,120.9 7805.1@97.468,120.9
NetBT1_0: BT1.0 DS1307_1.3 | length 51
  Bottom Layer w0.7: BT1.0@131.7,116.002 141.798,116.002 149.3,108.5 149.3,89.3 147.7,87.7 142,87.7 141.329,87.029 DS1307_1.3
NetBUZZ_2: BUZZ.2 Q1.3 | length 13.4
  Bottom Layer w0.7: BUZZ.2@62.656,52.044 70.936,43.764 Q1.3
NetC4_1: C4.1 Gref.2 | length 5.1
  Bottom Layer w0.7: C4.1 Gref.2
NetC5_2: C5.2 L1.2 U1.30 | length 40.5
  Bottom Layer w0.55: L1.2 75.302,97.4 96.9,97.4 99.4,94.9 106.918,94.9 C5.2@107.118,94.7 ; U1.30@105.982,90.98 105.982,92.282 107.118,93.418 C5.2
NetC7_1: C7.1 D1.1 V_IN.1 | length 24.4
  Bottom Layer w1.5: V_IN.1 68.256,117.856 72.596,122.196 D1.1@72.596,123.602 ; D1.1 D1.1@72.596,123.602 ; C7.1 81.72,122.68 80.798,123.602 D1.1@72.596,123.602
NetD2_1: D2.1 RLED.1 | length 16.6
  Bottom Layer w1.5: D2.1 63.484,108.7 66.7,108.7 67.2,108.2 77.918,108.2 RLED.1
NetDS1307_1_1: DS1307_1.1 Y2.1 | length 4.1
  Bottom Layer w0.7: Y2.1@135.07,81.37 136.4,82.7 136.4,84.679 DS1307_1.1
NetDS1307_1_2: DS1307_1.2 Y2.2 | length 4.1
  Bottom Layer w0.7: DS1307_1.2 138.789,82.711 Y2.2@140.198,81.302
NetGref_1: Gref.1 U1.32 Vref.1 | length 16.7
  Bottom Layer w0.7: Gref.1@87.4,94.7 Gref.1@88.236,94.7 ; Gref.1 Vref.1@92.756,95.288 ; Vref.1@92.756,94.788 Vref.1@92.964,94.996 ; Vref.1@92.964,94.788 92.964,93.936 94,92.9 98.782,92.9 U1.32
  Bottom Layer w0.85: U1.32@100.802,90.98 U1.32@100.802,91.398
NetP6_1: P6.1 U3.4 | length 30.5
  Bottom Layer w0.85: P6.1 119.872,30.8 140.5,30.8 143.104,33.404 U3.4
NetP6_2: P6.2 U3.3 | length 43.6
  Bottom Layer w0.85: P6.2 116.84,30.06 117.9,29 144.5,29 145.6,30.1 145.6,39.8 143.9,41.5 U3.3@143.3,41.5
NetP6_3: P6.3 U4.4 | length 11.3
  Bottom Layer w0.85: P6.3 114.3,33.2 115.4,34.3 117,34.3 119.104,36.404 U4.4@119.104,39.674
NetP6_4: P6.4 U4.3 | length 14.1
  Bottom Layer w0.85: P6.4 111.76,33.06 116.9,38.2 116.9,40.3 118.814,42.214 U4.3@119.104,42.214
NetP6_5: P6.5 U5.4 | length 17.6
  Bottom Layer w0.85: U5.4@95.104,39.674 97.426,39.674 100.4,36.7 103.812,36.7 P6.5
NetP6_6: P6.6 U5.3 | length 21.5
  Bottom Layer w0.7: U5.3@94.414,41.914 U5.3
  Bottom Layer w0.85: U5.3@94.314,41.814 92.9,40.4 92.9,38.7 96.5,35.1 103.4,35.1 106.68,31.82 P6.6
NetP100_3: P100.3 RLCD.1 | length 17.8
  Bottom Layer w0.7: RLCD.1@69.5,94.226 69.9,94.626 69.9,96.7 71.5,98.3 81.1,98.3 82.4,99.6 82.4,100.524 P100.3@82.748,100.872
NetROP1A_2: ROP1A.2 U4.1 | length 6
  Bottom Layer w0.7: U4.1@126.724,39.674 129.479,36.918 ROP1A.2@131.572,36.918
NetROP_0_2: ROP_0.2 U6.1 | length 5.6
  Bottom Layer w0.7: U6.1 84.894,38.306 86.482,36.718 ROP_0.2@88.82,36.718
NetROP_1B_2: ROP_1B.2 U5.1 | length 5.7
  Bottom Layer w0.85: U5.1@102.724,39.674 104.026,39.674 106.982,36.718 ROP_1B.2
NetROP_2_1: ROP_2.1 U3.1 | length 13.1
  Bottom Layer w0.7: U3.1 152.674,38.874 153.8,40 153.8,41.3 157.48,44.98 ROP_2.1
PWM1A: pad.3@127.4,59.9 pad.3@133.1,59.9 ROP1A.1 U1.19 | length 46.2
  Top Layer w0.7: pad.3@127.4,59.9 pad.3@133.1,59.9
  Bottom Layer w0.7: U1.19@126.302,75.74 125.9,75.338 127.1,74.138 127.1,64.7 131.4,60.4 pad.3@133.1,60.4 ; pad.3@127.4,60.4 127.4,52.7 128.4,51.7 131.4,51.7 133.4,49.7 133.4,47 131.272,44.872 ROP1A.1
PWM1B: ROP_1B.1 U1.18 | length 49.4
  Bottom Layer w0.7: ROP_1B.1 109.026,42.5 111.3,42.5 112.3,43.5 112.3,46.5 112,46.8 112,65.2 114.5,67.7 118.2,67.7 119.3,66.6 121.9,66.6 123.6,68.3 123.6,75.578 U1.18@123.762,75.74
PWM2: PWM_02.1 PWM_02.2 PWM_022.1 PWM_022.2 ROP_2.2 U1.21 | length 114
  Top Layer w0.7: PWM_02.1@124.824,78.926 PWM_02.2@124.824,86.546 ; PWM_022.1 PWM_022.2
  Bottom Layer w0.7: PWM_02.2@124.6,86.8 125.57,86.8 128.524,89.754 128.524,90.662 U1.21@128.842,90.98 ; PWM_02.1@124.8,79.3 125.424,78.676 128.524,78.676 131.15,76.05 131.15,75.15 128.3,72.3 128.3,65.8 132.3,61.8 135.8,61.8 141.4,56.2 141.4,47.7 138.238,44.538 PWM_022.2
  Bottom Layer w0.85: PWM_022.1 135.128,35.472 136.8,33.8 139.4,33.8 140.6,35 140.6,41.9 142.3,43.6 146.5,43.6 147.4,42.7 147.4,38 148.7,36.7 154.2,36.7 157.48,39.98 ROP_2.2
PWMO: PWM_0.1 PWM_0.2 ROP_0.1 U1.4 | length 42
  Top Layer w0.85: PWM_0.1@84.784,63.39 PWM_0.2
  Bottom Layer w0.85: PWM_0.1@84.784,63.39 84.8,63.374 82.3,60.874 82.3,52.4 82.9,51.8 86.7,51.8 89.8,48.7 89.8,45.8 ; PWM_0.2 84.784,71.884 88.202,75.302 U1.4@88.202,75.74 ; ROP_0.1 89.72,48.52 89.8,48.6
RESET: ISP1.6 RESET_0.1 RESET_0.2 S1.2 U1.9 | length 126.2
  Top Layer w0.8: RESET_0.1 RESET_0.2
  Bottom Layer w0.45: ISP1.6 65.264,67.4 67.83,67.4
  Bottom Layer w0.6: 67.83,67.53 67.88,67.58
  Bottom Layer w0.7: 67.88,67.58 67.9,67.6
  Bottom Layer w0.8: 67.9,67.6 68.8,68.5 72.2,68.5 74.2,70.5 74.2,75.1 78.1,79 99.1,79 100.902,77.198 100.902,74.902 99.5,73.5 99.5,67.2 101,65.7 109.1,65.7 110.7,64.1 110.7,44.582 RESET_0.2@110.744,44.538 ; RESET_0.1@110.8,36.8 112.8,36.8 115.1,39.1 115.1,40.7 118.1,43.7 122,43.7 123.3,42.4 123.3,36.5 126.708,33.092 S1.2
RS: P100.4 U1.29 | length 31.8
  Bottom Layer w0.6: P100.4@85.288,100.872 85.288,100.012 86.5,98.8 90.2,98.8 90.7,98.3 97.4,98.3 99.9,95.8 104.225,95.8 105.325,96.9 107.5,96.9 108.6,95.8 108.6,91.08 U1.29@108.4,90.88
RXD: pad.0@113.6,79.6 pad.2@113.6,84.5 SERIAL.1 U1.14 | length 61.2
  Top Layer w0.8: pad.0@113.6,79.6 pad.2@113.6,84.5
  Bottom Layer w0.8: SERIAL.1 71.924,77.724 75.9,81.7 105.7,81.7 108.5,84.5 pad.2@113.6,84.5 ; pad.0@113.6,79.6 113.602,79.598 U1.14@113.602,75.74
SCK: ISP1.1 U1.8 | length 42.8
  Bottom Layer w0.8: ISP1.1 68.164,61.064 69.2,62.1 69.2,63.3 71.244,65.344 80.389,65.344 80.433,65.3 89.5,65.3 90.9,66.7 96.5,66.7 97.5,67.7 97.5,73.7 98.362,74.562 U1.8@98.362,75.74
SCL: DS1307_1.6 RDS2.1 REE_2.1 U1.22 Ueea.6 | length 109
  Bottom Layer w0.55: 118.5,84 118.5,87.6 119.9,89 121.5,89 122.5,90 122.5,94.1
  Bottom Layer w0.7: 118.5,84 119.9,82.6 129.9,82.6 131.5,81 131.5,79.8 132.9,78.4 140.8,78.4 141.329,77.871 Ueea.6@141.329,74.994 ; 122.5,94.1 122.8,94.4 125.9,94.4 126.302,93.998 126.302,89.935 125.168,88.8 124.5,88.8 122.8,87.1 122.8,85.9 123.9,84.8 130.6,84.8 134.3,88.5 138.1,88.5 141.329,91.729 DS1307_1.6 142,93.121 142,96.9 142.636,97.536 RDS2.1 ; Ueea.6 141.629,73.471 142.2,72.9 148,72.9 150.3,75.2 150.3,81 149.532,81.768 REE_2.1
SDA: DS1307_1.5 RDS_1.2 REE_1.1 U1.23 Ueea.5 | length 66.6
  Bottom Layer w0.7: U1.23@123.762,90.98 123.762,89.662 122.1,88 120.4,88 119.6,87.2 119.6,85 120.8,83.8 132.2,83.8 132.7,83.3 ; Ueea.5@144.2,75.1 144.2,77 143.2,78 ; REE_1.1 143.968,78.768 143.2,78 ; RDS_1.2 144.018,94.996 143.869,94.847 DS1307_1.5 143.869,90.169 143,89.3 141,89.3 139,87.3 135,87.3 134,86.3 134,84.6 132.7,83.3 ; 132.7,83.3 132.9,83.3 132.9,80.2 133.6,79.5 141.7,79.5 143.2,78
TXD: pad.1@116.5,79.6 pad.3@116.5,84.5 SERIAL.2 U1.15 | length 65.3
  Top Layer w0.8: pad.1@116.5,79.6 pad.3@116.5,84.5
  Bottom Layer w0.8: SERIAL.2@64.2,80.264 70.964,80.264 73.9,83.2 104.4,83.2 107.7,86.5 115.6,86.5 116.5,85.6 pad.3@116.5,84.5 ; U1.15@116.142,75.74 116.142,77.342 116.5,77.7 pad.1@116.5,79.6
VCC: 7805.3 butt1.2 butt1.c1 butt2.2 butt2.c1 butt3.2 butt3.c1 butt4.2 butt4.c1 butt_INT0.2 butt_INT0.c1 butt_INT1.2 butt_INT1.c1 BUZZ.1 C1.2 C6.1 DS1307_1.8 Jp_Vcc.1 L1.1 P100.2 P100.10 P100.15 pad.1@102.2,93 pad.1@102.2,98.4 RDS2.2 RDS_1.1 REE_1.2 REE_2.2 RLED.2 RT1.1 Ueea.8 V012.1 V012.2 V_0.1 V_0.2 V_01.1 V_01.2 VCC_0.1 VCC_0.2 Vref.2 | length 589
  Top Layer w0.6: pad.1@102.2,93 pad.1@102.2,98.4
  Top Layer w0.7: V012.2 V012.1
  Top Layer w0.85: V_0.1 V_0.2
  Top Layer w1: V_01.2 V_01.1
  Top Layer w1.5: VCC_0.2 VCC_0.1
  Bottom Layer w0.6: Vref.2 97.672,95.288 99.589,93.371 101.229,93.371 pad.1@101.8,92.8 ; 98.9,106.8 100.1,105.6 100.1,102.7 100.528,102.272 100.528,100.872 100.3,100.644 100.3,98.8 100.7,98.4 pad.1@102.2,98.4
  Bottom Layer w0.7: 58,56.5 58.396,56.896 ; V012.2 58.396,56.896 ; BUZZ.1@62.6,44.472 62.6,43.3 61.848,42.548 60.648,42.548 59.248,41.148 RT1.1 57.658,56.158 58.396,56.896 ; V012.1 67.818,53.682 70.2,51.3 72,51.3 73.7,49.6 73.7,48.9 76.2,46.4 80.6,46.4 81.9,47.7 81.9,50.3 ; butt1.2@75.398,54.076 76.656,52.818 77.482,52.818 ; butt1.c1@77.73,52.818 77.482,52.818 ; butt2.2 91.456,52.818 butt2.c1@92.882,52.818 ; butt2.c1 butt2.c1@92.882,52.818 ; butt3.2@104.974,53.732 106.232,52.474 108.626,52.474 109.5,51.6 109.5,46.8 108.8,46.1 105.5,46.1 104.7,45.3 104.7,44.7 ; butt4.2@121.078,53.732 122.336,52.474 123.51,52.474 123.51,51.09 124.2,50.4 126.5,50.4 ; butt_INT1.2@135.446,53.932 136.704,52.674 139.026,52.674 140.1,51.6 140.1,47.9 138.7,46.5 134.4,46.5 133.2,45.3 133.2,42.6 ; Ueea.8@136.249,74.994 134.3,73.045 134.3,72 ; DS1307_1.8 132.75,92.45 131.3,93.9 131.3,97.7 130.448,98.552 130.448,105.052 125.2,110.3 125.2,124.05 128.25,127.1 147.2,127.1 155.9,118.4 155.9,109.3 154.6,108 154.6,65.4 ; butt_INT0.2@151.342,53.932 152.6,52.674 155.774,52.674 156.6,53.5 156.6,63.4 154.6,65.4 ; 77.482,52.818 80,50.3 81.9,50.3 ; 81.9,50.3 86.4,50.3 87.6,49.1 87.6,41.7 89.7,41.7 96.5,48.5 96.5,50.8 ; butt2.c1@92.882,52.818 94.9,50.8 96.5,50.8 ; 96.5,50.8 99.8,50.8 102.6,48 102.6,46.8 104.7,44.7 ; 104.7,44.7 104.7,43.9 107.9,40.7 111.2,40.7 114.2,43.7 114.2,46.5 113.3,47.4 113.3,50.1 113.7,50.5 117.6,50.5 121.9,46.2 125.8,46.2 126.5,46.9 126.5,50.4 ; 126.5,50.4 131.2,50.4 132.2,49.4 132.2,47.4 131.3,46.5 130.2,46.5 128.8,45.1 128.8,43.4 130.3,41.9 132.7,41.9 133.2,42.4 133.2,42.6 ; 133.2,42.6 133.8,42 137.2,42 142.7,47.5 142.7,57.1 136.7,63.1 132.9,63.1 129.5,66.5 129.5,71.1 130.4,72 134.3,72 ; 134.3,72 134.3,66.4 135.3,65.4 154.6,65.4
  Bottom Layer w0.8: 106.2,112.7 106.5,113 106.568,113.068
  Bottom Layer w0.85: 78.994,105.156 78.994,103.806 80.208,102.592 P100.2@80.208,100.872 ; 116.6,112.7 116.6,110.892 V_0.1
  Bottom Layer w1: V_01.1 110.236,105.664 113.228,102.672 P100.15@113.228,100.872
  Bottom Layer w1.5: VCC_0.2 61.214,102.286 62.916,100.584 Jp_Vcc.1 ; VCC_0.1 71.374,104.648 L1.1 75.438,105.156 78.994,105.156 84.456,105.156 86.566,107.266 RLED.2 94.828,109.228 96.782,111.182 96.782,113.182 98.1,114.5 100.9,114.5 ; V_01.2 100.036,105.664 98.9,106.8 98.9,109.1 100.9,111.1 100.9,114.5 ; 106.2,112.7 116.6,112.7 118.8,114.9 118.8,117.3 115.776,120.324 C6.1@115.692,120.324 ; 106.5,113 106.1,113 104.6,114.5 100.9,114.5 ; 106.568,113.068 C1.2
VCC_2: ISP1.4 Jp_Vcc.2 U1.10 | length 97.7
  Bottom Layer w0.45: 62.2,69.4 62.713,69.913 71.613,69.913
  Bottom Layer w0.7: 60.1,75.5 61.1,74.5 72.8,74.5 ; 62.2,69.4 62.2,64.2 62.796,63.604 ISP1.4 ; 71.613,69.913 72.8,71.1 72.8,74.5 ; U1.10@103.442,75.74 103.442,77.858 101,80.3 77.5,80.3 72.8,75.6 72.8,74.5
  Bottom Layer w0.8: 60.1,75.5 60.1,97 61.144,98.044 Jp_Vcc.2
XTAL1: C8.1 U1.13 Y1.2 | length 26.5
  Bottom Layer w0.85: C8.1 103.29,69.01 105.3,67 109.1,67 109.8,67.7 112.5,67.7 115.1,70.3 116.7,70.3 Y1.2@116.9,70.5
  Bottom Layer w0.9: U1.13@111.062,75.74 111.062,74.538 113,72.6 115.6,72.6 116.9,71.3 Y1.2@116.9,70.5
XTAL2: C3.1 U1.12 Y1.1 | length 11.6
  Bottom Layer w0.8: C3.1 108.286,69.058 109.7,70.472 Y1.1 111.916,71.284 108.522,74.678 U1.12
  Bottom Layer w1.5: U1.12 U1.12@108.522,75.74
pads on no net: DS1307_1.7 ISP1.5 ISP1.7 ISP1.8 P100.7 P100.8 P100.9 U1.20 U1.33 U1.34 U1.35 U1.36
copper on no net: | length 423.2
  Bottom Layer w0.55: 55.024,26.1 55.024,131.5 161.2,131.5 161.2,26.1 55.024,26.1

## Keep-outs
Keep-Out Layer:
  lines w0.254: 54.928,131.5 161.2,131.5 161.2,26 55.033,26 54.928,131.5

## Other copper
Bottom Layer:
  text "IN" at 103.8,121.8 h1.2
  text "_" at 111.9,115.1 h1.2
  text "." at 126.6,37 h3
  text "." at 90.5,35.8 h3
  text "4" at 122.7,32.5 h1.2

## Silkscreen, mask and mechanical layers (free items; w line width, h text height)
Top Overlay:
  lines w0.55: 54.928,26.1 161.4,26.1 161.4,131.6 55.025,131.6
  lines w0.6: 54.928,26.1 54.928,131.5 ; 78.212,76.91 131.212,76.91 ; 95.8,112.5 95.9,112.4 100.2,112.4 100.3,112.5 100.3,123.2 100.1,123.4 95.9,123.4 95.8,123.3 95.8,112.5
  text "1" at 93.8,124.1 h1.2
  text "_" at 57.5,121.2 h1.2 r90
  text "+" at 58.4,115.6 h1.2 r90
  text "VC" at 80.8,105.3 h1.2 r90
  text "RS" at 85.9,105.3 h1.2 r90
  text "RW" at 88.3,105.3 h1.2 r90
  text "EN" at 91.1,105.3 h1.2 r90
  text "GND" at 78.2,104.1 h1.2 r90
  text "D4" at 111.4,103.6 h1.2 r90
  text "D1" at 103.7,103.4 h1.2 r90
  text "D2" at 106.3,103.4 h1.2 r90
  text "D3" at 108.8,103.4 h1.2 r90
  text "1" at 145.2,100.3 h1.2
  text "10K" at 147.2,99.3 h1.2
  text "VC" at 141,96.8 h1.2 r90
  text "GND" at 143,95.5 h1.2 r90
  text "1" at 74.4,77.1 h1.2
  text "10K" at 149.7,76.9 h1.2 r180
  text "MO" at 68.8,75.5 h1.2 r90
  text "GD" at 58.9,72.1 h1.2 r180
  text "NC" at 58.8,69.5 h1.2 r180
  text "RS" at 58.9,66.9 h1.2 r180
  text "VC" at 58.9,64.3 h1.2 r180
  text "MI" at 73.301,64.3 h1.2 r180
  text "HETEAR" at 146.6,62.3 h1
  text "GD" at 58.9,61.4 h1.2 r180
  text "SCK" at 74.9,61.3 h1.2 r180
  text "MOTOR" at 135.2,59.1 h1
  text "MENU" at 106,58.5 h1
  text "DW" at 123,58.5 h1
  text "OK" at 77.3,58.4 h1
  text "UP" at 92.2,58.4 h1
  text "P0" at 103.1,34.3 h1.2 r90
  text "P2" at 118.7,34.3 h1.2 r90
  text "H" at 107.3,33.3 h1
  text "MO" at 112.3,33.3 h1
  text "WWW.ELASA.IR" at 71.1,30.3 h2.2
  text "4" at 114.4,28.3 h0.9
  text "3" at 106.3,28.2 h0.9
  text "4" at 109.3,28.2 h0.9
  text "3" at 111.4,28.2 h0.9
  text "BUZ" at 103.6,28.1 h1 r180
  text "1B" at 108.7,27.2 h1 r90
  text "1A" at 113.7,27.2 h1 r90
Mechanical 13:
  lines w0.254: 70.4,65.8 149.7,65.831 ; 70.435,65.861 70.435,83.361 ; 70.476,100.872 77.733,100.872 ; 142.035,75.871 78.035,75.871 78.035,83.371 ; 142.035,90.871 78.035,90.871 78.035,83.371 ; 142.091,75.933 142.091,83.433 ; 142.091,90.933 142.091,83.433 ; 142.434,100.9 149.691,100.9 ; 149.691,65.933 149.691,83.433 142.091,83.433 ; 149.691,83.333 149.691,100.833 ; 149.691,83.443 149.691,100.9 ; 78.035,83.371 70.435,83.371 70.435,100.869 149.691,100.9 ; 54.91,131.7 161.2,131.7 161.4,131.5 161.4,26.3 161.1,26 55.208,26 55.033,26.175 55.033,131.577 54.91,131.7

## Text inside footprints (layer, text, board x,y; h text height)
BT1: Top Overlay "CR2032" at 138,118.8 h1.2
butt1: Top Overlay "butt" at 71.552,55.54 h1.2
butt2: Top Overlay "butt" at 85.652,55.54 h1.2
butt3: Top Overlay "butt" at 99.928,55.54 h1.2
butt4: Top Overlay "butt" at 116.232,55.54 h1.2
butt_INT0: Top Overlay "butt" at 145.996,55.54 h1.52
butt_INT1: Top Overlay "butt" at 130.6,55.54 h1.52
BUZZ: Top Overlay "+" at 61.7,45.2 h2.54 r90
C6: Top Overlay "+" at 116.566,121.205 h2.54 r270
C7: Top Overlay "+" at 82.482,121.213 h2.54 r270
ISP1: Top Overlay "2" at 64.516,58.524 h1.27 r90; Top Overlay "1" at 67.056,59.032 h1.27 r90; Top Overlay "9" at 67.056,72.748 h1.27 r90; Top Overlay "10" at 64.516,72.748 h1.27 r90
Q1: Top Overlay "1" at 72.5,36.3 h1; Top Overlay "3" at 71.8,43 h1